# Altium PCB PCB1.PcbDoc
Units mm, origin at the board's own origin, x right, y up, seen from the top; angles counter-clockwise.
Board outline 203.33 x 50.8 mm, 2 copper layers (Top Layer, Bottom Layer); 29 components, 25 nets, 121 pads, 1 vias.
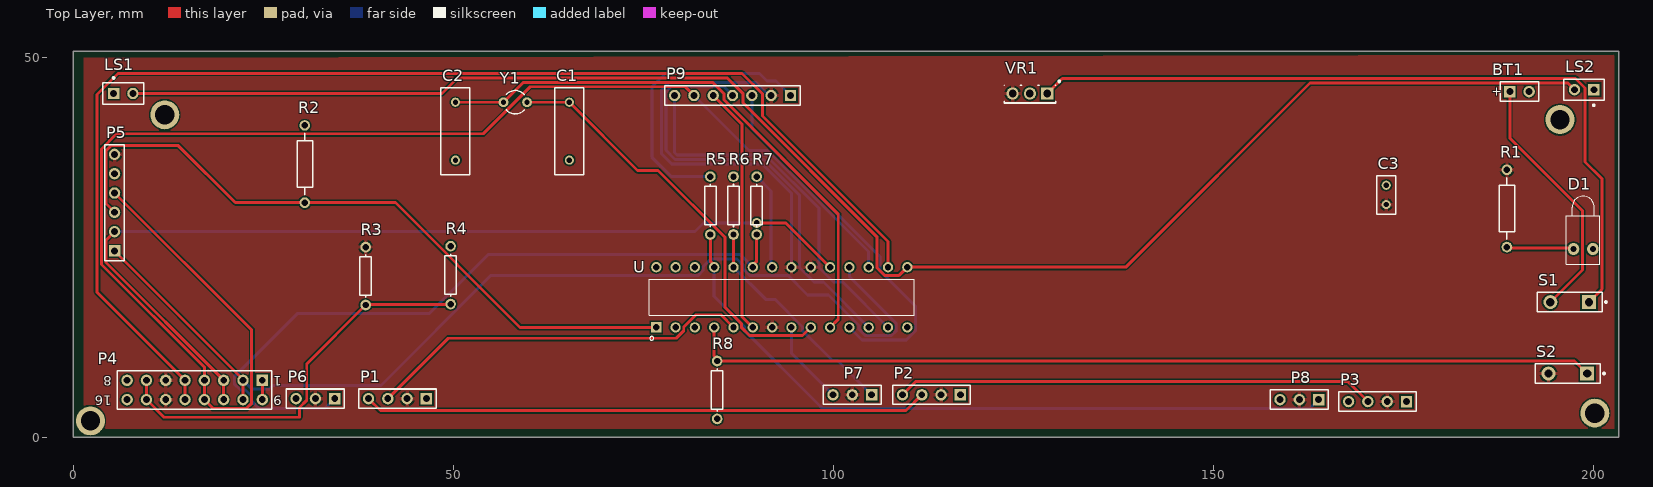
[diagram p0: Top Layer view]
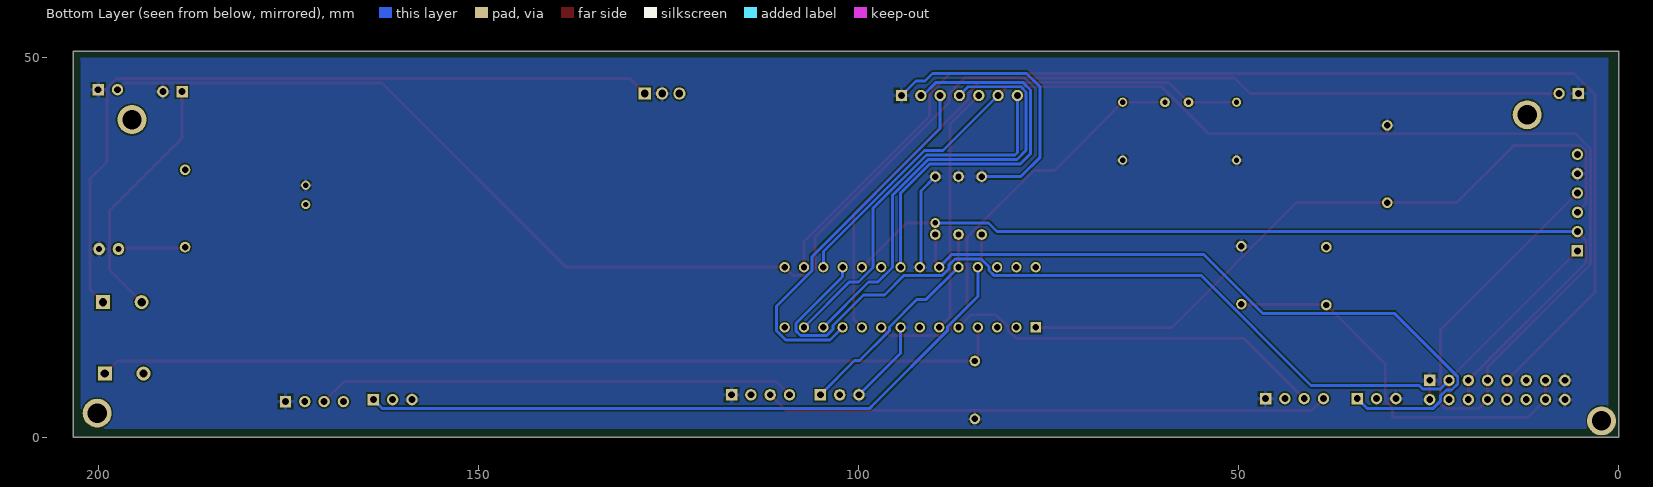
[diagram p1: Bottom Layer view, seen from below]

## Layer stack, top to bottom
Top Solder: solder mask 0.0102, Solder Resist, Dk 3.5
Top Layer: signal copper 0.0356
Dielectric 1: dielectric 0.32, FR-4, Dk 4.8
Bottom Layer: signal copper 0.0356
Bottom Solder: solder mask 0.0102, Solder Resist, Dk 3.5

## Board outline
0,0 203.327,0 203.327,50.8 0,50.8

## Design rules (kind name [scope] priority, off if disabled: settings)
BoardOutlineClearance [All] p1: gap=0.2 ignorepadtopadclearanceinfootprint=FALSE except(0.4: Arc-SplitBarrior Arc-SplitContinuation Track-SplitBarrior Track-SplitContinuation SMDPad-SplitBarrior SMDPad-SplitContinuation THPad-SplitBarrior THPad-SplitContinuation Via-SplitBarrior Via-SplitContinuation Fill-SplitBarrior Fill-SplitContinuation Poly-SplitBarrior Poly-SplitContinuation Region-SplitBarrior Region-SplitContinuation Text-SplitBarrior Text-SplitContinuation)
Clearance "Clearance Bottom Layer" [OnLayer('Bottom Layer')] p1: gap=0.203 ignorepadtopadclearanceinfootprint=TRUE except(0.254: Arc-Text Track-Text SMDPad-Text THPad-Text Via-Text Fill-Text Poly-Text Region-Text Text-Text)
Clearance "Clearance Top Layer" [OnLayer('Top Layer')] p2: gap=0.203 ignorepadtopadclearanceinfootprint=TRUE except(0.254: Arc-Text Track-Text SMDPad-Text THPad-Text Via-Text Fill-Text Poly-Text Region-Text Text-Text)
Clearance [All] p3: gap=0.2 ignorepadtopadclearanceinfootprint=FALSE except(0.089: Arc-Arc Arc-Track Arc-SMDPad Track-Track Track-SMDPad SMDPad-SMDPad; 0.127: Arc-Via Track-Via SMDPad-Via THPad-Via Via-Via; 0.254: Arc-Text Track-Text SMDPad-Text THPad-Text Via-Text Fill-Text Poly-Text Region-Text Text-Text)
HoleSize [All] p1: absolutevalues=TRUE maxlimit=6.3 minlimit=0.2 maxpercent=80.000 minpercent=20.000
MinimumAnnularRing [All] p1: minimumring=0.076
MinimumSolderMaskSliver [All] p1: minsoldermaskwidth=0.1
PolygonConnect PolygonConnect_1 [All] p1: thpad.connectstyle=Relief thpad.reliefconductorwidth=0.508 thpad.reliefentries=4 thpad.polygonreliefangle="90 Angle" thpad.airgapwidth=0.254 smdpad.connectstyle=Relief smdpad.reliefconductorwidth=0.508 smdpad.reliefentries=4 smdpad.polygonreliefangle="90 Angle" smdpad.airgapwidth=0.254 via.connectstyle=Direct via.reliefconductorwidth=0.508 via.reliefentries=4 via.polygonreliefangle="90 Angle" via.airgapwidth=0.254
RoutingCorners [All] p1: cornerstyle=Round minsetback=2.54 maxsetback=2.54
RoutingVias [All] p1: holewidth=0.5 width=1 viastyle="Through Hole" minholewidth=0.2 minwidth=0.45 maxholewidth=1 maxwidth=2
SilkToSilkClearance [All] p1: silktosilkclearance=0.1
SilkToSolderMaskClearance [IsPad] p1: minsilkscreentomaskgap=0.1 clearancetoexposedcopper=TRUE
SolderMaskExpansion [All] p1: expansion=0.102 istentingtop=FALSE
Width [All] p1: maxlimit=2.54 minlimit=0.089 preferedwidth=0.381
25 further rules are at their usual default settings.

## Components (designator, comment, footprint, x,y, rotation, side; value= is the part's Value field where it differs from the comment)
BT1 "Battery" BAT-2 190.246,45.466 r0 top
C1 "Cap" RAD-0.3 65.278,40.259 r90 top value=22pF
C2 "Cap" RAD-0.3 50.292,40.259 r90 top value=22pF
C3 "Cap Pol1" RAD-0.1 172.72,31.877 r90 top value=10uF
D1 "LED0" LED-1 198.628,24.765 r90 top
LS1 "Speaker" PIN2 5.334,45.212 r0 top
LS2 "Speaker" PIN2 200.025,45.72 r180 top
P1 "Ring 1" HDR1X4 46.481,5.08 r180 top
P2 "Ring 2" HDR1X4 116.713,5.588 r180 top
P3 "Ring 3" HDR1X4 175.387,4.699 r180 top
P4 "SD Card Reader" HDR2X8_CEN 24.892,7.493 r180 top
P5 "Programmer" HDR1X6 5.461,24.511 r90 top
P6 "Header 3" HDR1X3 34.417,5.08 r180 top
P7 "Header 3" HDR1X3 105.029,5.588 r180 top
P8 "Header 3" HDR1X3 163.83,4.953 r180 top
P9 "OLED" HDR1X7 94.361,44.958 r180 top
R1 "Res2" AXIAL-0.4 188.595,30.099 r270 top value=470
R2 "Res2" AXIAL-0.4 30.48,35.941 r90 top value=1K
R3 "Res1" AXIAL-0.3 38.481,21.209 r90 top value=1K
R4 "Res1" AXIAL-0.3 49.657,21.336 r270 top value=2K
R5 "Res1" AXIAL-0.3 83.82,30.48 r270 top value=1K
R6 "Res1" AXIAL-0.3 86.868,30.48 r270 top value=1K
R7 "Res1" AXIAL-0.3 89.916,30.48 r270 top value=1K
R8 "Res1" AXIAL-0.3 84.709,6.223 r90 top value=1K
S1 "SW-SPST" SPST-2 196.85,17.78 r180 top
S2 "SW-PB" SPST-2 196.596,8.382 r180 top
U "ATMEGA328P-PU" DIP794W46P254L2967H457Q28B 93.218,18.415 r90 top
VR1 "Volt Reg" 369-03 125.857,45.212 r180 top
Y1 "XTAL" R38 58.166,44.069 r90 top

## Footprints (in the part's own frame and the unit in brackets; to place one, negate y for a bottom-side part, rotate by r counter-clockwise, add the part's x,y. Pads: shape width x height; smd on the part's side, far side on the other; paste and mask are expansions set on the pad)
369-03 [mm] "TO, Thru-Hole, Vertical, Heatsink Mounted; 3 In-Line Leads; Pitch 2.28 mm"
  rect 1.6x1.6 hole 1: 1(-2.28,0)
  round 1.6 hole 1: 2(0,0) 3(2.28,0)
  silkscreen extent -3.98,-1.72 3.4,1.3, body extent -3.45,-1.15 3.45,1.35, height 9.7
AXIAL-0.3 [mm] "Axial Device, Thru-Hole; 2 Leads; 0.3 in Pin Spacing"
  round 1.4 hole 0.85: 1(-3.81,0) 2(3.81,0)
  silkscreen extent -2.77,-0.76 2.77,0.76
AXIAL-0.4 [mm] "Axial Device, Thru-Hole; 2 Leads; 0.4 in Pin Spacing"
  round 1.4 hole 0.85: 1(-5.08,0) 2(5.08,0)
  silkscreen extent -4.06,-1.02 4.06,1.02
BAT-2 [mm] "Battery; 2 Leads"
  rect 1.5x1.5 hole 0.9: 1(-1.27,0)
  round 1.5 hole 0.9: 2(1.27,0)
  silkscreen extent -2.54,-1.27 2.54,1.27
DIP794W46P254L2967H457Q28B [mm]
  rect 1.358x1.358 hole 0.85: 1(-3.96,16.51)
  round 1.358 hole 0.85: 2(-3.96,13.97) 3(-3.96,11.43) 4(-3.96,8.89) 5(-3.96,6.35) 6(-3.96,3.81) 7(-3.96,1.27) 8(-3.96,-1.27) 9(-3.96,-3.81) 10(-3.96,-6.35) 11(-3.96,-8.89) 12(-3.96,-11.43) 13(-3.96,-13.97) 14(-3.96,-16.51) 15(3.96,-16.51) 16(3.96,-13.97) 17(3.96,-11.43) 18(3.96,-8.89) 19(3.96,-6.35) 20(3.96,-3.81) 21(3.96,-1.27) 22(3.96,1.27) 23(3.96,3.81) 24(3.96,6.35) 25(3.96,8.89) 26(3.96,11.43) 27(3.96,13.97) 28(3.96,16.51)
  silkscreen extent -5.65,-17.4 2.38,17.4
HDR1X3 [mm] "Connector; Header; 3 Position"
  rect 1.5x1.5 hole 0.9: 1(0,0)
  round 1.5 hole 0.9: 2(2.54,0) 3(5.08,0)
  silkscreen extent -1.27,-1.27 6.35,1.27
HDR1X4 [mm] "Connector; Header; 4 Position"
  rect 1.5x1.5 hole 0.9: 1(0,0)
  round 1.5 hole 0.9: 2(2.54,0) 3(5.08,0) 4(7.62,0)
  silkscreen extent -1.27,-1.27 8.89,1.27
HDR1X6 [mm] "Connector; Header; 6 Position"
  rect 1.5x1.5 hole 0.9: 1(0,0)
  round 1.5 hole 0.9: 2(2.54,0) 3(5.08,0) 4(7.62,0) 5(10.16,0) 6(12.7,0)
  silkscreen extent -1.27,-1.27 13.97,1.27
HDR1X7 [mm] "Connector; Header; 7 Position"
  rect 1.5x1.5 hole 0.9: 1(0,0)
  round 1.5 hole 0.9: 2(2.54,0) 3(5.08,0) 4(7.62,0) 5(10.16,0) 6(12.7,0) 7(15.24,0)
  silkscreen extent -1.27,-1.27 16.51,1.27
HDR2X8_CEN [mm] "Connector; Header; 8x2 Position"
  rect 1.5x1.5 hole 0.9: 1(0,0)
  round 1.5 hole 0.9: 2(2.54,0) 3(5.08,0) 4(7.62,0) 5(10.16,0) 6(12.7,0) 7(15.24,0) 8(17.78,0) 9(0,2.54) 10(2.54,2.54) 11(5.08,2.54) 12(7.62,2.54) 13(10.16,2.54) 14(12.7,2.54) 15(15.24,2.54) 16(17.78,2.54)
  silkscreen extent -1.27,-1.27 19.05,3.81
LED-1 [mm] "LED; 2 Leads"
  oval 1.6x1.5 hole 0.8: 1(0,1.27) 2(0,-1.27)
  silkscreen extent -2,-2.2 6.95,2.2
PIN2 [mm] "Photosensitive Diode; 2 Leads"
  rect 1.5x1.5 hole 0.9: 1(0,0)
  round 1.5 hole 0.9: 2(2.54,0)
  silkscreen extent -1.4,-1.4 3.94,2.17
R38 [mm] "Crystal, Thru-Hole; 2 Leads; Body 3.1 x 8.2 mm (Dia.xH)"
  round 1.3 hole 0.7: 1(0,1.55) 2(0,-1.55)
  silkscreen extent -1.55,-1.19 1.55,1.17
RAD-0.1 [mm] "Radial Cap, Thru-Hole; 2 Leads; 0.1 in Pin Spacing"
  round 1.2 hole 0.7: 1(-1.27,0) 2(1.27,0)
  silkscreen extent -2.54,-1.27 2.54,1.27
RAD-0.3 [mm] "Radial Cap, Thru-Hole; 2 Leads; 0.3 in Pin Spacing"
  round 1.2 hole 0.7: 1(-3.81,0) 2(3.81,0)
  silkscreen extent -5.71,-1.91 5.71,1.91
SPST-2 [mm] "Switch; 2 Leads"
  rect 1.85x1.85 hole 1.1: 1(-2.54,0)
  round 1.85 hole 1.1: 2(2.54,0)
  silkscreen extent -4.89,-1.27 4.28,1.27

## Part data
BT1: "Multicell Battery", LatestRevisionDate=17-Jul-2002, LatestRevisionNote="Re-released for DXP Platform.", PackageDescription="Battery; 2 Leads", PackageReference=BAT-2, Published=24-Mar-1999, Publisher="Altium Limited"
C1 C2: "Capacitor", LatestRevisionDate=17-Jul-2002, LatestRevisionNote="Re-released for DXP Platform.", PackageDescription="Radial Cap, Thru-Hole; 2 Leads; 0.3 in Pin Spacing", PackageReference=RAD-0.3, Published=8-Jun-2000, Publisher="Altium Limited"
C3: "Polarized Capacitor (Radial)", LatestRevisionDate=17-Jul-2002, LatestRevisionNote="Re-released for DXP Platform.", PackageDescription="Polarized Capacitor (Radial); 2 Leads", PackageReference=RB7.6-15, Published=8-Jun-2000, Publisher="Altium Limited"
D1: "Typical INFRARED GaAs LED", LatestRevisionDate=08-Jul-2005, LatestRevisionNote="Mech Layer 1 removed.", PackageDescription="LED; 2 Leads", PackageReference=LED-0, Published=8-Jun-2000, Publisher="Altium Limited"
LS1 LS2: "Loudspeaker", LatestRevisionDate=17-Jul-2002, LatestRevisionNote="Re-released for DXP Platform.", PackageReference=PIN2, Published=24-Mar-1999, Publisher="Altium Limited"
P1 P2 P3: library part "Header 4", "Header, 4-Pin", LatestRevisionDate=17-Jul-2002, LatestRevisionNote="Re-released for DXP Platform.", Publisher="Altium Limited"
P4: library part "Header 8X2A", "Header, 8-Pin, Dual row", LatestRevisionDate=17-Jul-2002, LatestRevisionNote="Re-released for DXP Platform.", Publisher="Altium Limited"
P5: library part "Header 6", "Header, 6-Pin", LatestRevisionDate=17-Jul-2002, LatestRevisionNote="Re-released for DXP Platform.", Publisher="Altium Limited"
P6 P7 P8: "Header, 3-Pin", LatestRevisionDate=17-Jul-2002, LatestRevisionNote="Re-released for DXP Platform.", Publisher="Altium Limited"
P9: library part "Header 7", "Header, 7-Pin", LatestRevisionDate=17-Jul-2002, LatestRevisionNote="Re-released for DXP Platform.", Publisher="Altium Limited"
R1 R2 R3 R4 R5 R6 R7 R8: "Resistor", LatestRevisionDate=17-Jul-2002, LatestRevisionNote="Re-released for DXP Platform.", Published=8-Jun-2000, Publisher="Altium Limited"
  R1 R2: PackageDescription="Axial Device, Thru-Hole; 2 Leads; 0.4 in Pin Spacing", PackageReference=AXIAL-0.4
  R3 R4 R5 R6 R7 R8: PackageDescription="Axial Device, Thru-Hole; 2 Leads; 0.3 in Pin Spacing", PackageReference=AXIAL-0.3
S1: "Single-Pole, Single-Throw Switch", LatestRevisionDate=17-Jul-2002, LatestRevisionNote="Re-released for DXP Platform.", PackageDescription="Switch; 2 Leads", PackageReference=SPST-2, Published=24-Mar-1999, Publisher="Altium Limited"
S2: "Switch", LatestRevisionDate=17-Jul-2002, LatestRevisionNote="Re-released for DXP Platform.", PackageDescription="Switch; 2 Leads", PackageReference=SPST-2, Published=24-Mar-1999, Publisher="Altium Limited"
U: "AVR AVRÂ® ATmega Microcontroller IC 8-Bit 20MHz 32KB _16K x 16_ FLASH 28-PDIP", Package="PDIP-28 Atmel", Availability=Unavailable, MF=Microchip, MP=ATMEGA328P-PU, Price=None, SnapEDA_Link=https://www.snapeda.com/parts/ATMEGA328P-PU/Microchip/view-part/44282/?ref=snap
VR1: "Voltage Regulator", LatestRevisionDate=29-May-2009, LatestRevisionNote="IPC-7351 Footprint Added.", PackageDescription="3-Pin Transistor Outline Package 2.54 mm Pitch, 15.1 mm Lead Span", PackageReference=D2PAK, Published=24-Mar-1999, Publisher="Altium Limited"
Y1: "Crystal Oscillator", LatestRevisionDate=17-Jul-2002, LatestRevisionNote="Re-released for DXP Platform.", PackageDescription="Crystal, Thru-Hole; 2 Leads; Body 3.1 x 8.2 mm (Dia.xH)", PackageReference=R38, Published=8-Jun-2000, Publisher="Altium Limited"

## Free pads (board coordinates)
  round 3.81 hole 2.54: 2(2.286,2.159) 2(12.065,42.418) 2(195.58,41.783) 2(200.152,3.175)

## Via types
v1: diameter 1.27, hole 0.711, Top Layer to Bottom Layer, 1 vias

## Nets (pads, with @x,y where several pads share a name; then routed paths per layer and width w, separated by ;. In a path a pad name is that pad's centre, name@x,y a point inside that pad or via, vN(x,y) a via of type N, cw(c..) or ccw(c..) an arc to the next point about the centre after c; other vN are vias at no path point)
+5: C3.1 P1.2 P2.2 P3.2 P4.6 P4.14 P5.6 P6.2 P7.2 P8.2 P9.2 R1.1 R3.2 S2.2 U.7 U.20 U.21 VR1.3 | length 53.1
  Top Layer w0.381: VR1.3 VR1.3@123.577,45.366
  Bottom Layer w0.381: P9.2 91.518,44.958 89.79,46.686 78.405,46.686 77.393,45.674 77.393,37.288 78.713,35.968 90.611,35.968 94.488,32.091 U.21
GND: BT1.2 C1.1 C2.1 C3.2 D1.2 LS1.1 LS2.1 P1.1 P2.1 P3.1 P4.1 P4.8 P4.9 P4.16 P5.5 P6.3 P7.3 P8.3 P9.1 R2.2 R4.1 R5.1 R6.1 R7.1 R8.1 U.8 U.22 VR1.2 | length 64.6
  Top Layer w0.381: P4.9 P4.1
  Bottom Layer w0.381: R5.1 78.676,34.29 76.124,36.842 76.124,46.057 77.921,47.854 90.274,47.854 91.254,46.875 92.444,46.875 P9.1 ; R7.1 91.808,32.398 91.808,22.515 U.22 ; U.8 94.488,11.049 P7.3
NetBT1_1: BT1.1 S1.2 | length 33.4
  Top Layer w0.381: BT1.1 188.976,39.376 198.552,29.801 198.552,22.022 S1.2
NetC1_2: C1.2 U.9 Y1.2 | length 56.1
  Top Layer w0.381: Y1.2 C1.2 74.26,35.087 76.949,35.087 85.774,26.262 85.774,17.066 87.941,14.899 87.941,14.405 88.964,13.382 95.955,13.382 U.9
NetC2_2: C2.2 U.10 Y1.1 | length 74.4
  Top Layer w0.381: C2.2 Y1.1 59.233,46.686 84.091,46.686 85.597,45.179 85.597,44.388 100.641,29.344 100.641,15.528 U.10
NetD1_1: D1.1 R1.2 | length 8.9
  Top Layer w0.381: R1.2 188.722,24.892 197.231,24.892 D1.1
NetLS1_2: LS1.2 LS2.2 U.15 | length 215.2
  Top Layer w0.381: LS1.2 48.521,45.212 50.579,47.27 86.046,47.27 88.137,45.179 88.137,43.966 105.721,26.382 105.721,22.325 106.744,21.302 108.655,21.302 U.15 138.453,22.375 162.688,46.61 196.595,46.61 LS2.2
NetP1_3: P1.3 U.5 | length 51
  Top Layer w0.381: P1.3 49.351,13.03 79.34,13.03 80.321,14.011 80.321,14.505 81.928,16.112 85.211,16.112 U.5
NetP1_4: P1.4 P2.3 | length 74.3
  Top Layer w0.381: P1.4 40.435,3.507 109.552,3.507 P2.3
NetP2_4: P2.4 P3.3 | length 63
  Top Layer w0.381: P2.4 110.821,7.316 167.69,7.316 P3.3
NetP4_2: P4.2 P4.10 P5.1 U.18 | length 136.2
  Top Layer w0.381: P5.1 22.352,7.62 P4.2 P4.10
  Bottom Layer w0.381: P4.2 23.496,6.349 25.805,6.349 26.264,6.808 40.486,6.808 54.98,21.302 82.232,21.302 82.861,21.931 82.861,22.425 83.884,23.448 87.312,23.448 88.138,22.622 88.138,22.128 88.964,21.302 94.044,21.302 96.617,18.729 99.351,18.729 103.378,14.702 103.378,14.208 104.204,13.382 107.632,13.382 108.261,14.011 108.261,14.984 102.12,21.124 102.12,22.363 U.18
NetP4_3: P4.3 P4.11 P5.2 U.19 | length 126
  Top Layer w0.381: P5.2 4.317,25.907 4.317,22.988 P4.3 P4.11 ; v1(89.916,28.194) 93.749,28.194 U.19
  Bottom Layer w0.381: P5.2 81.788,27.051 82.931,28.194 v1(89.916,28.194)
NetP4_4: P4.4 P4.12 P5.4 P9.6 U.17 | length 196
  Top Layer w0.381: P5.4 23.496,14.096 23.496,4.479 22.826,3.809 18.416,3.809 P4.12 P4.4 17.272,9.207 3.733,22.746 3.733,37.927 5.734,39.927 53.95,39.927 60.125,46.102 80.517,46.102 P9.6
  Bottom Layer w0.381: P9.6 88.898,37.721 91.337,37.721 104.606,24.452 104.606,22.417 U.17
NetP4_5: P4.5 P4.13 U.16 | length 164.4
  Top Layer w0.381: P4.13 P4.5 3.149,19.076 3.149,45.084 5.92,47.854 88.002,47.854 90.677,45.179 90.677,42.252 107.188,25.741 U.16
NetP4_7: P4.7 P4.15 R3.1 R4.2 | length 53.2
  Top Layer w0.381: P4.7 P4.15 11.964,2.641 29.785,2.641 29.785,3.911 30.733,4.859 30.733,9.651 R3.1 38.544,17.462 49.593,17.462 R4.2
NetP5_3: P5.3 R2.1 U.1 | length 91.1
  Top Layer w0.381: P5.3 4.317,30.735 4.317,37.685 4.987,38.355 13.849,38.355 21.343,30.861 R2.1 42.395,30.861 58.801,14.455 U.1
NetP6_1: P6.1 R7.2 U.23 | length 96.5
  Top Layer w0.381: U.23 89.408,22.639 89.916,23.147 R7.2
  Bottom Layer w0.381: P6.1 33.146,3.809 24.418,3.809 23.496,4.732 23.496,5.427 22.699,6.223 22.005,6.223 21.208,7.019 21.208,7.967 29.547,16.305 46.89,16.305 54.616,24.032 87.751,24.032 U.23
NetP7_1: P7.1 R6.2 U.24 | length 29.7
  Top Layer w0.381: U.24 R6.2
  Bottom Layer w0.381: U.24 91.098,18.145 92.315,18.145 95.955,14.505 95.955,14.011 99.887,10.079 100.538,10.079 P7.1
NetP8_1: P8.1 R5.2 U.25 | length 94.7
  Top Layer w0.381: R5.2 83.82,23.147 84.328,22.639 U.25
  Bottom Layer w0.381: U.25 84.328,18.512 88.335,14.505 88.335,14.011 97.902,4.444 98.537,3.809 162.686,3.809 P8.1
NetP9_3: P9.3 U.11 | length 49.7
  Bottom Layer w0.381: P9.3 89.281,40.603 106.115,23.768 106.115,21.931 110.801,17.245 110.801,14.011 109.588,12.798 103.765,12.798 U.11
NetP9_4: P9.4 U.12 | length 59.1
  Bottom Layer w0.381: 77.977,39.678 77.977,37.76 79.185,36.552 90.853,36.552 95.561,31.844 95.561,22.325 97.482,20.404 98.699,20.404 U.12 ; 77.977,43.514 77.977,45.432 78.647,46.102 85.597,46.102 P9.4 ; 77.978,39.678 77.978,43.513
NetP9_5: P9.5 U.6 | length 32.7
  Top Layer w0.381: P9.5 87.962,41.197 87.962,15.901 U.6
NetP9_7: P9.7 U.13 | length 49.7
  Bottom Layer w0.381: P9.7 79.121,37.442 79.427,37.136 91.095,37.136 98.101,30.131 98.101,22.325 100.022,20.404 101.239,20.404 U.13
NetR8_2: R8.2 S2.1 U.4 | length 119.7
  Top Layer w0.381: U.4 84.328,10.69 84.709,10.309 R8.2 197.485,10.033 S2.1
NetS1_1: S1.1 VR1.1 | length 101.9
  Top Layer w0.381: VR1.1 130.119,47.194 197.629,47.194 198.881,45.941 198.881,36.211 201.092,34.001 201.092,19.482 S1.1
pads on no net: P3.4 U.2 U.3 U.14 U.26 U.27 U.28

## Polygon pours and split planes (outlines as drawn)
GND on Bottom Layer "GND_L02_P001" (solid, pour order 1): 1.397,49.911 202.565,49.911 202.311,49.657 202.311,1.143 1.651,1.143 1.397,1.397
+5 on Top Layer "+5_L01_P003" (solid, pour order 3): 1.397,49.911 1.397,1.143 202.692,1.143 202.692,50.292

## Text inside footprints (layer, text, board x,y; h text height)
BT1: Top Overlay "+" at 186.576,44.889 h1.15
P4: Top Overlay "16" at 5.08,5.461 h1.27 r180; Top Overlay "8" at 5.08,8.001 h1.27 r180; Top Overlay "1" at 27.432,8.001 h1.27 r180; Top Overlay "9" at 27.432,5.461 h1.27 r180